# Altium PCB Spindle Drive.PcbDoc
Units mil, origin at the board's own origin, x right, y up, seen from the top; angles counter-clockwise.
Board outline 6000 x 4000 mil, 2 copper layers (Top Layer, Bottom Layer); 38 components, 37 nets, 143 pads, 51 vias.
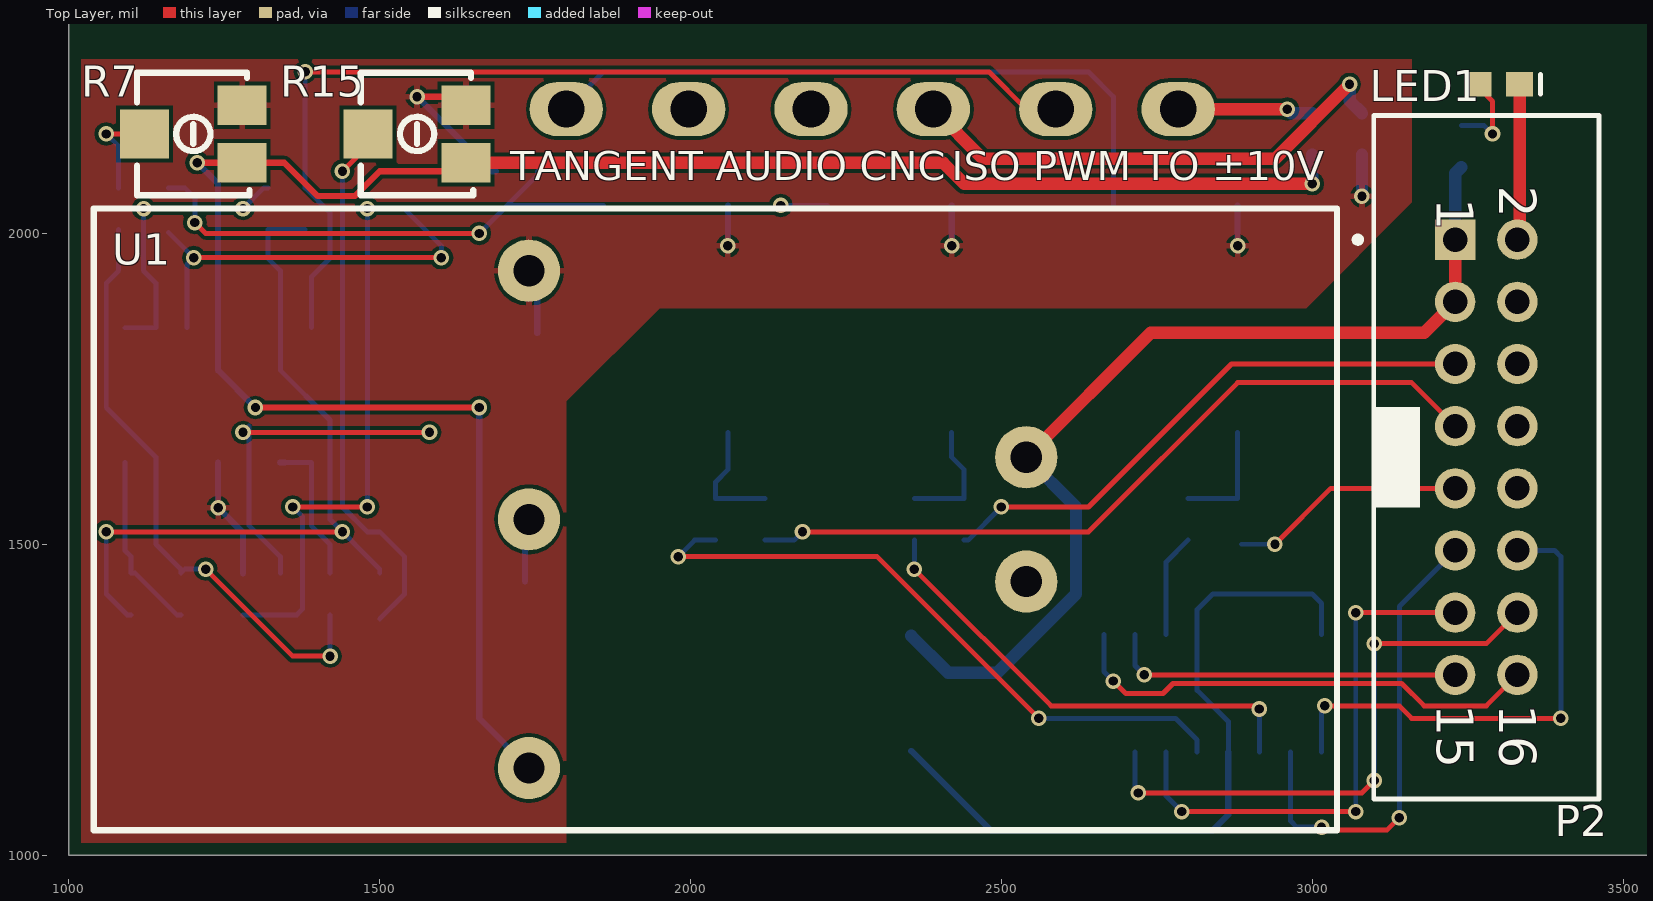
[diagram p0: Top Layer view]
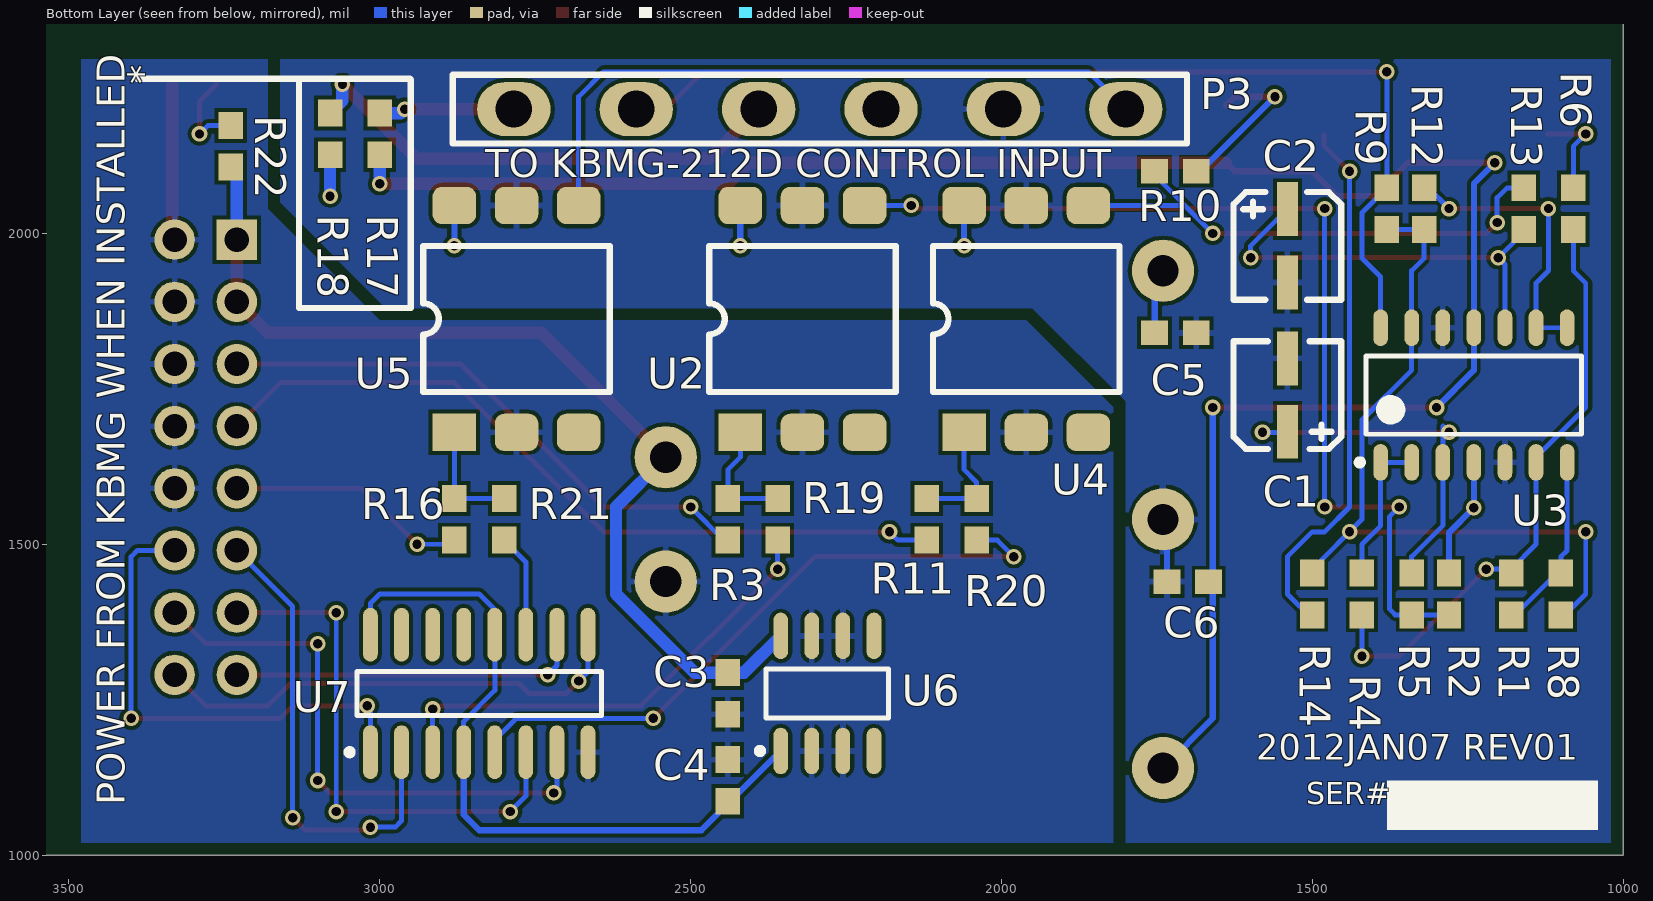
[diagram p1: Bottom Layer view, seen from below]

## Layer stack, top to bottom
Top Layer: signal copper 1.4
Dielectric: dielectric 12.6, FR-4, Dk 4.8
Bottom Layer: signal copper 1.4

## Board outline
1000,1000 7000,1000 7000,5000 1000,5000

## Design rules (kind name [scope] priority, off if disabled: settings)
Clearance [All] p1: gap=6
ComponentClearance [All] p1: gap=10 collisioncheckmode=3 verticalgap=10
PolygonConnect [All] p1: connectstyle=Relief reliefconductorwidth=10 reliefentries=4 polygonreliefangle="90 Angle"
RoutingVias [All] p1: holewidth=15 width=25 viastyle="Through Hole" minholewidth=15 minwidth=25 maxholewidth=15 maxwidth=25
SolderMaskExpansion [All] p1: expansion=4
TestPointUsage [All] p1: valid=0 allowmultiple=FALSE
Testpoint [All] p1: side=15 testpointundercomponent=TRUE minsize=40 maxsize=100 preferedsize=60 minholesize=0 maxholesize=40 preferedholesize=32 testpointgrid=1 style=1023 order=0-112345678
Width [All] p1: maxlimit=20 minlimit=6 preferedwidth=10
18 further rules are at their usual default settings.

## Components (designator, comment, footprint, x,y, rotation, side; value= is the part's Value field where it differs from the comment)
C1 "Cap Pol3" PANASONIC_HA_B 1540,1740 r270 bottom
C2 "Cap Pol3" PANASONIC_HA_B 1540,1980 r90 bottom
C3 "Cap Semi" 1608[0603] 2440,1260 r90 bottom
C4 "Cap Semi" 1608[0603] 2440,1120 r270 bottom
C5 "Cap Semi" 1608[0603] 1720,1840 r180 bottom
C6 "Cap Semi" 1608[0603] 1700,1440 r0 bottom
LED1 "LED3" CD1608-0603 3300,2240 r0 top
P2 "Header 8X2" IDC2.54-V16D 3280,1640 r270 top
P3 "Phoenix_1933228" Phoenix_1933228 1800,2200 r0 bottom
R1 "Res3" J1-0603 1180,1420 r270 bottom
R2 "Res3" J1-0603 1280,1420 r90 bottom
R3 "Res3" J1-0603 2440,1540 r270 bottom
R4 "Res3" J1-0603 1420,1420 r270 bottom
R5 "Res3" J1-0603 1340,1420 r90 bottom
R6 "Res3" J1-0603 1080,2040 r90 bottom
R7 "RPot SM" Copal_ST-4EA 1200,2160 r90 top
R8 "Res3" J1-0603 1100,1420 r90 bottom
R9 "Res3" J1-0603 1380,2040 r270 bottom
R10 "Res3" J1-0603 1720,2100 r180 bottom
R11 "Res3" J1-0603 2120,1540 r270 bottom
R12 "Res3" J1-0603 1320,2040 r90 bottom
R13 "Res3" J1-0603 1160,2040 r90 bottom
R14 "Res3" J1-0603 1500,1420 r90 bottom
R15 "RPot SM" Copal_ST-4EA 1560,2160 r90 top
R16 "Res3" J1-0603 2880,1540 r270 bottom
R17 "Res3" J1-0603 3000,2160 r270 bottom
R18 "Res3" J1-0603 3080,2160 r270 bottom
R19 "Res3" J1-0603 2360,1540 r90 bottom
R20 "Res3" J1-0603 2040,1540 r90 bottom
R21 "Res3" J1-0603 2800,1540 r90 bottom
R22 "Res3" J1-0603 3240,2140 r270 bottom
U1 "ASD705-12D12" Astrodyne_ASD705 1040,2040 r270 top
U2 "H11L1-M" H11L3M_SMT 2420,1680 r90 bottom
U3 "TL074N" SOIC127P600-14AN 1240,1740 r90 bottom
U4 "H11L1-M" H11L3M_SMT 2060,1680 r90 bottom
U5 "H11L1-M" H11L3M_SMT 2880,1680 r90 bottom
U6 "µA78L05ACD" D008_L 2280,1260 r90 bottom
U7 "MC3486D" D016_N 2840,1260 r90 bottom

## Footprints (in the part's own frame and the unit in brackets; to place one, negate y for a bottom-side part, rotate by r counter-clockwise, add the part's x,y. Pads: shape width x height; smd on the part's side, far side on the other; paste and mask are expansions set on the pad)
1608[0603] [mm] "Chip Capacitor; Body 1.6 x 0.8 mm (LxW typ)"
  rect 1.1x1 smd: 1(-0.85,0) 2(0.85,0)
Astrodyne_ASD705 [mil]
  round 100 hole 50: 1(400,1500) 2(600,1500) 3(100,700) 4(500,700) 5(900,700)
  silkscreen extent 0,0 1000,2000
CD1608-0603 [mm] "Chip Diode; Body 1.6 x 0.8 mm (LxW typ)"
  rect 1.1x1 smd: 1(-0.85,0) 2(0.85,0)
  silkscreen extent 1.7,-0.4 1.7,0.4
Copal_ST-4EA [mm]
  rect 1.6x2 smd: 1(-1.175,-2) 3(1.175,-2)
  rect 2x2 smd: 2(0,2)
  silkscreen extent -2.5,-2.3 2.5,2.3
D008_L [mm] "SOIC, 8-Leads, Body 4.9x3.9mm, Pitch 1.27mm, IPC High Density"
  oval 1.9x0.6 smd: 1(-2.35,1.905) 2(-2.35,0.635) 3(-2.35,-0.635) 4(-2.35,-1.905) 5(2.35,-1.905) 6(2.35,-0.635) 7(2.35,0.635) 8(2.35,1.905)
  silkscreen extent -2.47,-2.5 1,2.88, body extent -2,-2.5 2,2.5, height 1.75
D016_N [mm] "SOIC, 16-Leads, Body 9.9x3.9mm, Pitch 1.27mm, IPC Medium Density"
  oval 2.2x0.6 smd: 1(-2.4,4.445) 2(-2.4,3.175) 3(-2.4,1.905) 4(-2.4,0.635) 5(-2.4,-0.635) 6(-2.4,-1.905) 7(-2.4,-3.175) 8(-2.4,-4.445) 9(2.4,-4.445) 10(2.4,-3.175) 11(2.4,-1.905) 12(2.4,-0.635) 13(2.4,0.635) 14(2.4,1.905) 15(2.4,3.175) 16(2.4,4.445)
  silkscreen extent -2.52,-5 0.9,5.42, body extent -1.95,-4.95 1.95,4.95, height 1.75
H11L3M_SMT [mil]
  rect 60x70 smd: 1(0,0)
  rrect50% 60x70 smd: 2(0,-100) 3(0,-200) 4(365,-200) 5(365,-100) 6(365,0)
  silkscreen extent 65,-250 300,50
IDC2.54-V16D [mm] "Connector; IDC, Low Profile Male Header, Thru-Hole; 16 Position; Vertical; Pitch 2.54 mm; Body 27.94 x 9.2 x 9.45 mm (LxWxH)"
  rect 1.65x1.65 hole 1: 1(-8.89,-1.27)
  round 1.65 hole 1: 2(-8.89,1.27) 3(-6.35,-1.27) 4(-6.35,1.27) 5(-3.81,-1.27) 6(-3.81,1.27) 7(-1.27,-1.27) 8(-1.27,1.27) 9(1.27,-1.27) 10(1.27,1.27) 11(3.81,-1.27) 12(3.81,1.27) 13(6.35,-1.27) 14(6.35,1.27) 15(8.89,-1.27) 16(8.89,1.27)
  silkscreen extent -13.97,-5.37 13.97,4.6, body extent -13.97,-4.6 13.97,4.6, height 9.45
J1-0603 [mm] "Chip Resistor; Body 1.6 x 0.8 mm (LxW typ)"
  rect 1.1x1 smd: 1(-0.85,0) 2(0.85,0)
PANASONIC_HA_B [mm]
  rect 2.2x0.85 smd: 1(1.5,0) 2(-1.5,0)
  silkscreen extent -2.2,-2.2 2.2,2.2
Phoenix_1933228 [mm] "Phoenix Contact 5mm Pin Header"
  oval 3x2.2 hole 1.5: 1(0,0) 2(5,0) 3(10,0) 4(15,0) 5(20,0) 6(25,0)
  silkscreen extent -2.5,-1.4 27.5,1.4
SOIC127P600-14AN [mm] "SOIC, 14-Leads, Body 8.6x3.9mm, Pitch 1.27mm, IPC Medium Density"
  oval 1.5x0.6 smd: 1(-2.75,3.81) 2(-2.75,2.54) 3(-2.75,1.27) 4(-2.75,0) 5(-2.75,-1.27) 6(-2.75,-2.54) 7(-2.75,-3.81) 8(2.75,-3.81) 9(2.75,-2.54) 10(2.75,-1.27) 11(2.75,0) 12(2.75,1.27) 13(2.75,2.54) 14(2.75,3.81)
  silkscreen extent -2.87,-4.4 1.6,4.79, body extent -2,-4.38 2,4.38, height 1.73

## Part data
C1 C2: "Polarized Capacitor (Surface Mount)"
C3 C4 C5 C6: "Capacitor (Semiconductor SIM Model)"
LED1: "Typical BLUE SiC LED"
P2: library part "Header 5X2", "Header, 5-Pin, Dual row"
R1 R2 R3 R4 R5 R6 R8 R9 R10 R11 R12 R13 R14 R16 R17 R18 R19 R20 R21 R22: "Resistor"
R7 R15: "Square Trimming Potentiometer"
U1: "Astrodyne 9-18VDC in, +/-12VDC out iso regulated DC-DC"
U3: "Low-Noise JFET-Input Operational Amplifier"
U6: "Positive-Voltage Regulator"
U7: "Quadruple Line Receiver with 3-State Output"

## Via types
v1: diameter 25, hole 15, Top Layer to Bottom Layer, 51 vias

## Nets (pads, with @x,y where several pads share a name; then routed paths per layer and width w, separated by ;. In a path a pad name is that pad's centre, name@x,y a point inside that pad or via, vN(x,y) a via of type N, cw(c..) or ccw(c..) an arc to the next point about the centre after c; other vN are vias at no path point)
+12V_ISO: C5.1 R2.2 R7.3 R10.2 R15.3 R18.2 U1.3 U2.6 U3.4 U4.6 U5.6 | length 822.6
  Top Layer w10: v1(1560,2220) 1625,2220 R15.3
  Bottom Layer w10: U3.4 v1(1240,1558.79) 1280,1518.79 R2.2 ; v1(1560,2220) 1680,2100 R10.2 ; U1.3 1753.46,1926.54 C5.1 ; v1(2060,1980) U4.6 ; v1(2420,1980) U2.6 ; v1(2880,1980) U5.6
  Bottom Layer w20: v1(3080,2060) R18.2
+15VDRV: P3.4 R18.1 | length 807.1
  Top Layer w20: P3.4 2470.55,2120 2940,2120 v1(3060,2240)
  Bottom Layer w20: v1(3060,2240) 3060,2213.46 R18.1
-12V_ISO: C6.1 R7.1 R15.1 R17.2 U1.5 U3.11 | length 3304.5
  Top Layer w10: v1(1206.26,2113.74) 1346.26,2113.74 1400,2060 1460,2060 1500,2100 1625,2100 R15.1 ; v1(1300,1720) v1(1660,1720)
  Top Layer w20: R15.1 2406.26,2113.74 2440,2080 v1(3000,2080)
  Bottom Layer w10: v1(1206.26,2113.74) 1240,2080 1240,1780 v1(1300,1720) ; v1(1660,1720) 1660,1220 U1.5
  Bottom Layer w20: v1(3000,2080) R17.2
-15VDRV: P3.6 R17.1 | length 222.7
  Top Layer w20: P3.6@2780,2200 v1(2960,2200)
  Bottom Layer w20: v1(2960,2200) 2966.54,2193.46 R17.1
DRV_ENA: P3.1 U5.4 | length 1096.4
  Bottom Layer w8: P3.1 1860,2260 2640,2260 2680,2220 U5.4
DRV_SIG: P3.5 R9.1 U3.14 | length 1673
  Top Layer w8: v1(1380,2260) 2480,2260 2540,2200 P3.5
  Bottom Layer w8: v1(1380,2260) R9.1 1420,2033.46 1420,1960 1390,1930 U3.14
ENABLE_B: P2.16 U7.9 | length 781.2
  Top Layer w8: v1(2680,1280) 2700,1260 2760,1260 2776,1276 3144,1276 3180,1240 3280,1240 P2.16
  Bottom Layer w8: U7.9 2665,1295 v1(2680,1280)
GND: C3.1 C4.1 LED1.2 P2.2 P2.4 P2.6 P2.8 P2.10 U1.2 U2.2 U4.2 U5.2 U6.2 U6.3 U6.6 U6.7 U7.8 | length 246.5
  Top Layer w20: P2.2@3333.46,1993.46 LED1.2
GND_ISO: C1.2 C2.2 C5.2 C6.2 P3.2 U1.4 U2.5 U3.5 U3.12 U4.5 U5.5 | length 93.5
  Bottom Layer w10: C6.2 U1.4@1733.46,1533.46
NetC1_1: C1.1 R5.2 U3.3 | length 610.4
  Top Layer w8: v1(1280,1680) v1(1580,1680)
  Bottom Layer w8: v1(1280,1680) 1290,1690 1290,1530 1340,1480 R5.2 ; C1.1@1540.94,1680 v1(1580,1680)
NetC2_1: C2.1 R13.1 U3.10 | length 675.8
  Top Layer w8: v1(1200.94,1960.94) v1(1599.06,1960.94)
  Bottom Layer w8: R13.1@1160,2001.89 v1(1200.94,1960.94) 1190,1950 U3.10 ; C2.1 1599.06,1980 v1(1599.06,1960.94)
NetLED1_1: LED1.1 R22.1 | length 146.9
  Top Layer w8: LED1.1@3262.6,2240 3290,2212.6 v1(3290,2160)
  Bottom Layer w8: R22.1 3276.54,2173.46 v1(3290,2160)
NetP2_5: P2.5 R3.2 | length 907.4
  Top Layer w8: v1(2500,1560) 2640,1560 2870,1790 P2.5
  Bottom Layer w8: R3.2 2446.54,1506.54 v1(2500,1560)
NetP2_7: P2.7 R11.2 | length 1244
  Top Layer w8: v1(2180,1520) 2640,1520 2880,1760 3160,1760 P2.7
  Bottom Layer w8: R11.2 2166.54,1506.54 v1(2180,1520)
NetP2_9: P2.9 R16.2 | length 380.7
  Top Layer w8: v1(2940,1500) 3030,1590 P2.9
  Bottom Layer w8: R16.2@2886.54,1500 v1(2940,1500)
NetP2_11: P2.11 U7.2 | length 767.3
  Top Layer w8: v1(3015,1045) 3020,1040 3120,1040 v1(3140,1060)
  Bottom Layer w8: U7.2 2965,1055 2975,1045 v1(3015,1045) ; v1(3140,1060) 3140,1400 P2.11
NetP2_13: P2.13 U7.6 | length 865.9
  Top Layer w8: v1(2790,1070) v1(3070,1070) ; v1(3070,1390) P2.13
  Bottom Layer w8: U7.6 2765,1095 v1(2790,1070) ; v1(3070,1070) v1(3070,1390)
NetP2_15: P2.15 U7.10 | length 570.7
  Top Layer w8: v1(2730,1290) P2.15
  Bottom Layer w8: U7.10 2715,1305 v1(2730,1290)
NetR1_1: R1.1 R4.2 R6.1 U3.6 | length 978.3
  Top Layer w8: v1(1220,1460) 1360,1320 v1(1420,1320)
  Bottom Layer w8: R6.1 1080,1940 1060,1920 1060,1720 1140,1640 1140,1500 1180,1460 R1.1 1186.54,1460 v1(1220,1460) ; v1(1420,1320) R4.2
NetR1_2: R1.2 R8.2 U3.7 | length 290.1
  Bottom Layer w8: U3.7 1090,1490 1100,1480 R8.2 1106.54,1453.46 1173.46,1386.54 R1.2
NetR2_1: R2.1 R5.1 U2.4 | length 1612.6
  Top Layer w8: v1(1360,1560) v1(1480,1560) ; v1(1480,2040) 2140,2040 v1(2145,2045)
  Bottom Layer w8: R2.1 1366.54,1386.54 1376,1396 1376,1544 v1(1360,1560) ; v1(1480,1560) v1(1480,2040) ; v1(2145,2045) U2.4
NetR3_1: R3.1 R19.2 U2.1 | length 194.8
  Bottom Layer w8: R19.2 R3.1 2440,1620 2420,1640 U2.1
NetR4_1: R4.1 U3.1 U3.2 | length 247.9
  Bottom Layer w8: U3.2 U3.1 1390,1530 1420,1500 R4.1
  Bottom Layer w10: U3.2 U3.2@1347.16,1631.73
NetR6_2: R6.2 R7.2 | length 156.1
  Top Layer w8: v1(1060,2160) R7.2
  Bottom Layer w8: v1(1060,2160) 1080,2140 R6.2
NetR8_1: R8.1 R9.2 R12.1 R14.2 U3.13 | length 1221.5
  Top Layer w8: v1(1060,1520) v1(1440,1520)
  Bottom Layer w8: v1(1060,1520) 1060,1420 1093.46,1386.54 R8.1 ; R9.2 R12.1 1320,1960 1340,1940 1340,1780 1420,1700 1420,1540 1500,1460 R14.2
NetR10_1: R10.1 R13.2 U4.4 | length 847.6
  Top Layer w8: v1(1202.5,2017.5) 1220,2000 v1(1660,2000)
  Bottom Layer w8: R13.2 1186.54,2073.46 1202.5,2057.5 v1(1202.5,2017.5) ; v1(1660,2000) 1753.46,2093.46 R10.1 ; 1705,2045 U4.4
NetR11_1: R11.1 R20.2 U4.1 | length 194.8
  Bottom Layer w8: U4.1 2060,1620 2040,1600 R20.2 R11.1
NetR12_2: R12.2 U3.8 U3.9 | length 463.9
  Top Layer w8: v1(1120,2040) v1(1280,2040)
  Bottom Layer w8: U3.8 U3.9 1140,1920 1120,1940 v1(1120,2040) ; v1(1280,2040) 1313.46,2073.46 R12.2
NetR14_1: R14.1 R15.2 | length 865.5
  Top Layer w8: v1(1440,2100) 1481.26,2141.26 R15.2@1481.26,2158.74
  Bottom Layer w8: v1(1440,2100) 1440,1560 1480,1520 1500,1520 1540,1480 1540,1420 R14.1@1500,1380
NetR16_1: R16.1 R21.2 U5.1 | length 186.5
  Bottom Layer w8: R21.2 R16.1 U5.1
NetR19_1: R19.1 U7.3 | length 764.2
  Top Layer w8: v1(2360,1460) 2580,1240 2910,1240 v1(2915,1235)
  Bottom Layer w8: v1(2360,1460) R19.1 ; U7.3 v1(2915,1235)
NetR20_1: R20.1 U7.5 | length 1047.7
  Top Layer w8: v1(1980,1480) 2300,1480 v1(2560,1220)
  Bottom Layer w8: v1(1980,1480) 2006.54,1506.54 R20.1 ; v1(2560,1220) 2780,1220 2815,1185 U7.5
NetR21_1: R21.1 U7.11 | length 166.5
  Bottom Layer w8: U7.11 2765,1471.54 R21.1
PWM_NEG_B: P2.12 U7.1 | length 799
  Top Layer w8: v1(3020,1240) 3140,1240 3160,1220 v1(3400,1220)
  Bottom Layer w8: U7.1 3015,1235 v1(3020,1240) ; P2.12 3390,1490 3400,1480 v1(3400,1220)
PWM_POS_B: P2.14 U7.7 | length 926.6
  Top Layer w8: v1(2720,1100) 3080,1100 v1(3100,1120) ; v1(3100,1340) 3280,1340 P2.14
  Bottom Layer w8: U7.7 2715,1105 v1(2720,1100) ; v1(3100,1120) v1(3100,1340)
VCC: C4.2 U6.1 U7.4 U7.12 U7.16 | length 1191
  Bottom Layer w8: U7.4 2865,1215 2815,1265 2815,1395 2840,1420 3000,1420 3015,1405 U7.16
  Bottom Layer w10: U6.1 2482.48,1040 2840,1040 2865,1065 U7.4
VIN: C3.2 P2.1 P2.3 R22.2 U1.1 U6.8 | length 1609.2
  Top Layer w20: U1.1 2740,1840 3180,1840 P2.3 P2.1
  Bottom Layer w20: U6.8 2414.06,1293.46 2493.46,1293.46 2620,1420 2620,1560 U1.1 ; P2.1 3230,2096.54 R22.2
pads on no net: P3.3 U2.3 U4.3 U5.3 U6.4 U6.5 U7.13 U7.14 U7.15

## Polygon pours and split planes (outlines as drawn)
+12V_ISO on Top Layer "Bottom Layer-No Net" (solid, remove dead copper): 3160,2280 3160,2050 2990,1880 1950,1880 1800,1730 1800,1020 1020,1020 1020,2280 3160,2280
GND on Bottom Layer "Bottom Layer-No Net" (solid, remove dead copper): 3480,2280 3180,2280 3180,2040 3000,1860 1960,1860 1820,1720 1820,1020 3480,1020 3480,2280
GND_ISO on Bottom Layer "Bottom Layer-No Net" (solid, remove dead copper): 3160,2280 3160,2050 2990,1880 1950,1880 1800,1730 1800,1020 1020,1020 1020,2280 3160,2280

## Silkscreen, mask and mechanical layers (free items; w line width, h text height)
Top Overlay:
  text "TANGENT AUDIO CNC" at 1710,2070 h80
  text "ISO PWM TO ±10V" at 2420,2070 h80
Bottom Overlay:
  region: 1380,1120 1040,1120 1040,1040 1380,1040
  lines w10: 3130,2248.82 3130,1880 2950,1880 2950,2247.65 2951.18,2248.82 3390,2248.82
  text "*" at 3360,2240 h45 r270
  text "TO KBMG-212D CONTROL INPUT" at 2830,2090 h45
  text "2012JAN07 REV01" at 1590,1140 h70
  text "POWER FROM KBMG WHEN INSTALLED" at 3410,1080 h45 r270
  text "SER#" at 1510,1070 h60
Mechanical 1:
  lines w10: 1000,1020 3500,1020 3500,1000 ; 1000,2280 3500,2280 ; 1020,2300 1020,1000 1000,1000 ; 1800,1020 1800,1730 1950,1880 2990,1880 3160,2050 3160,2280 ; 1820,1020 1820,1720 1960,1860 3000,1860 3180,2040 3180,2280 ; 3480,1000 3480,2300 ; 1000,1000 1000,2300 3500,2300 3500,1000 ; 1000,1000 3500,1000

## Text inside footprints (layer, text, board x,y; h text height)
P2: Top Overlay "15" at 3200.47,1242.76 h59.06 r270; Top Overlay "16" at 3300.47,1242.76 h59.06 r270; Top Overlay "1" at 3200.47,2056.92 h59.06 r270; Top Overlay "2" at 3300.47,2076.6 h59.06 r270